# Allegro board dl-wkv0101.brd
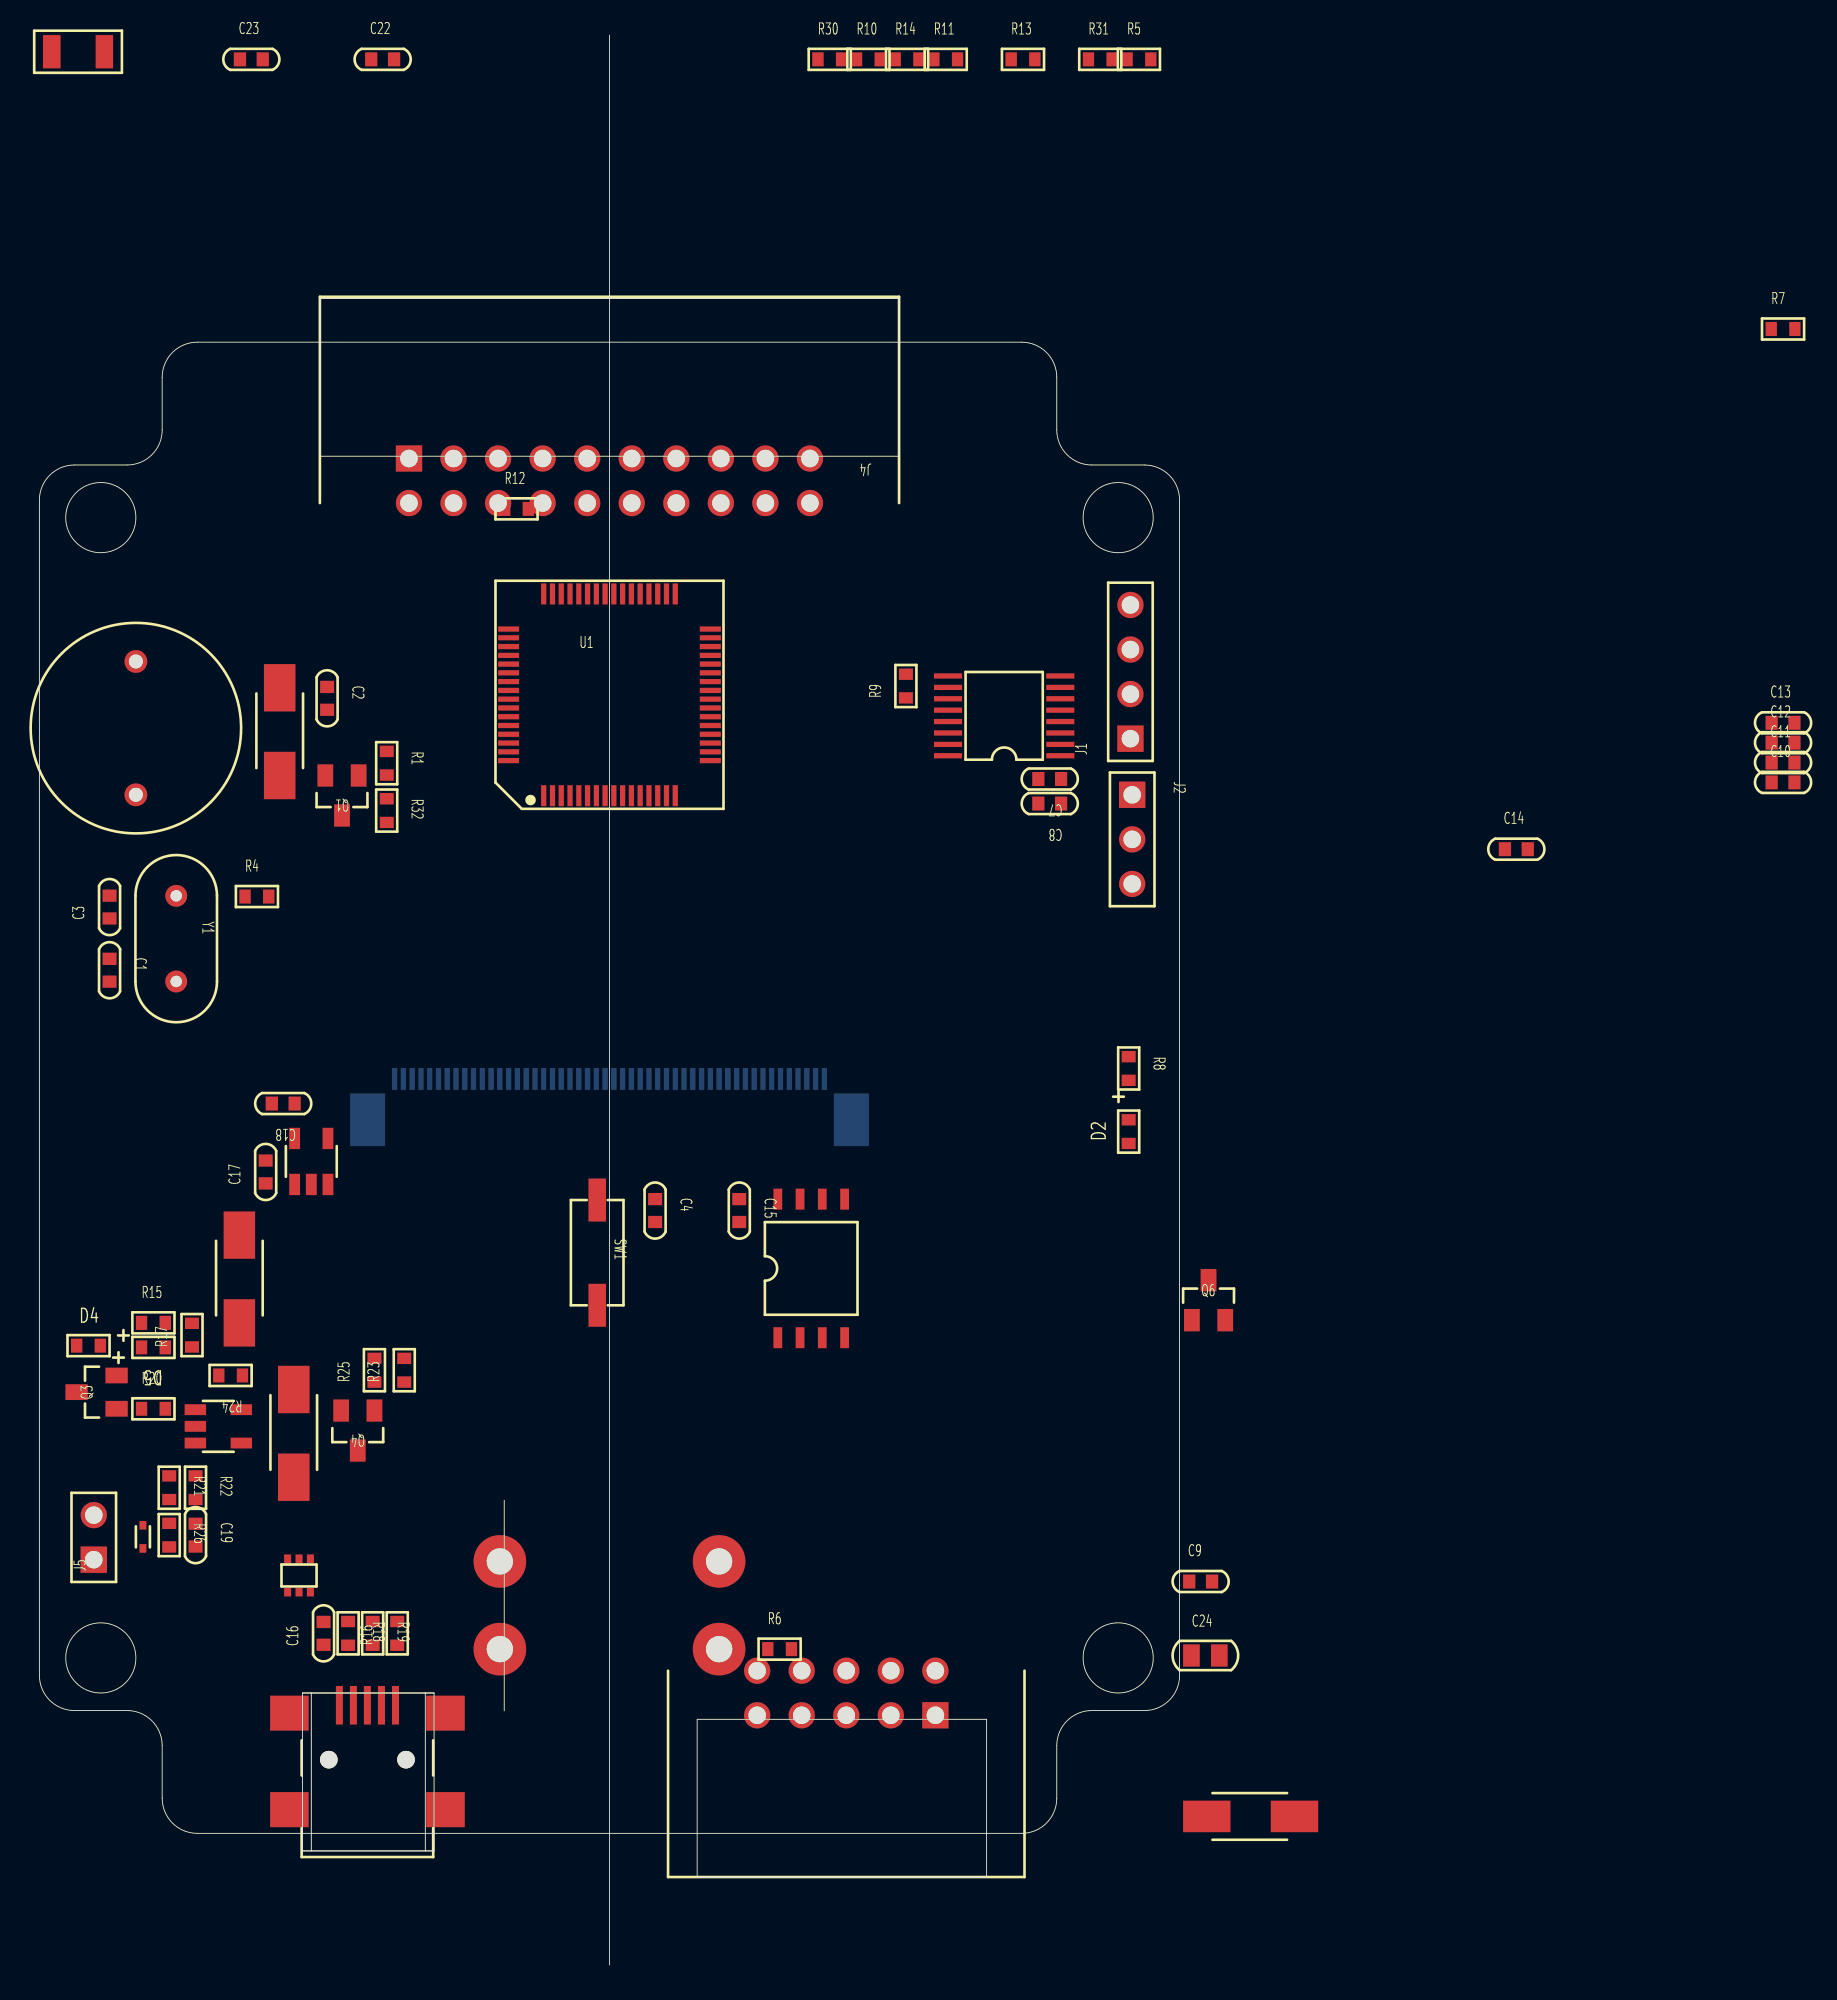
[diagram p0: board, top side]
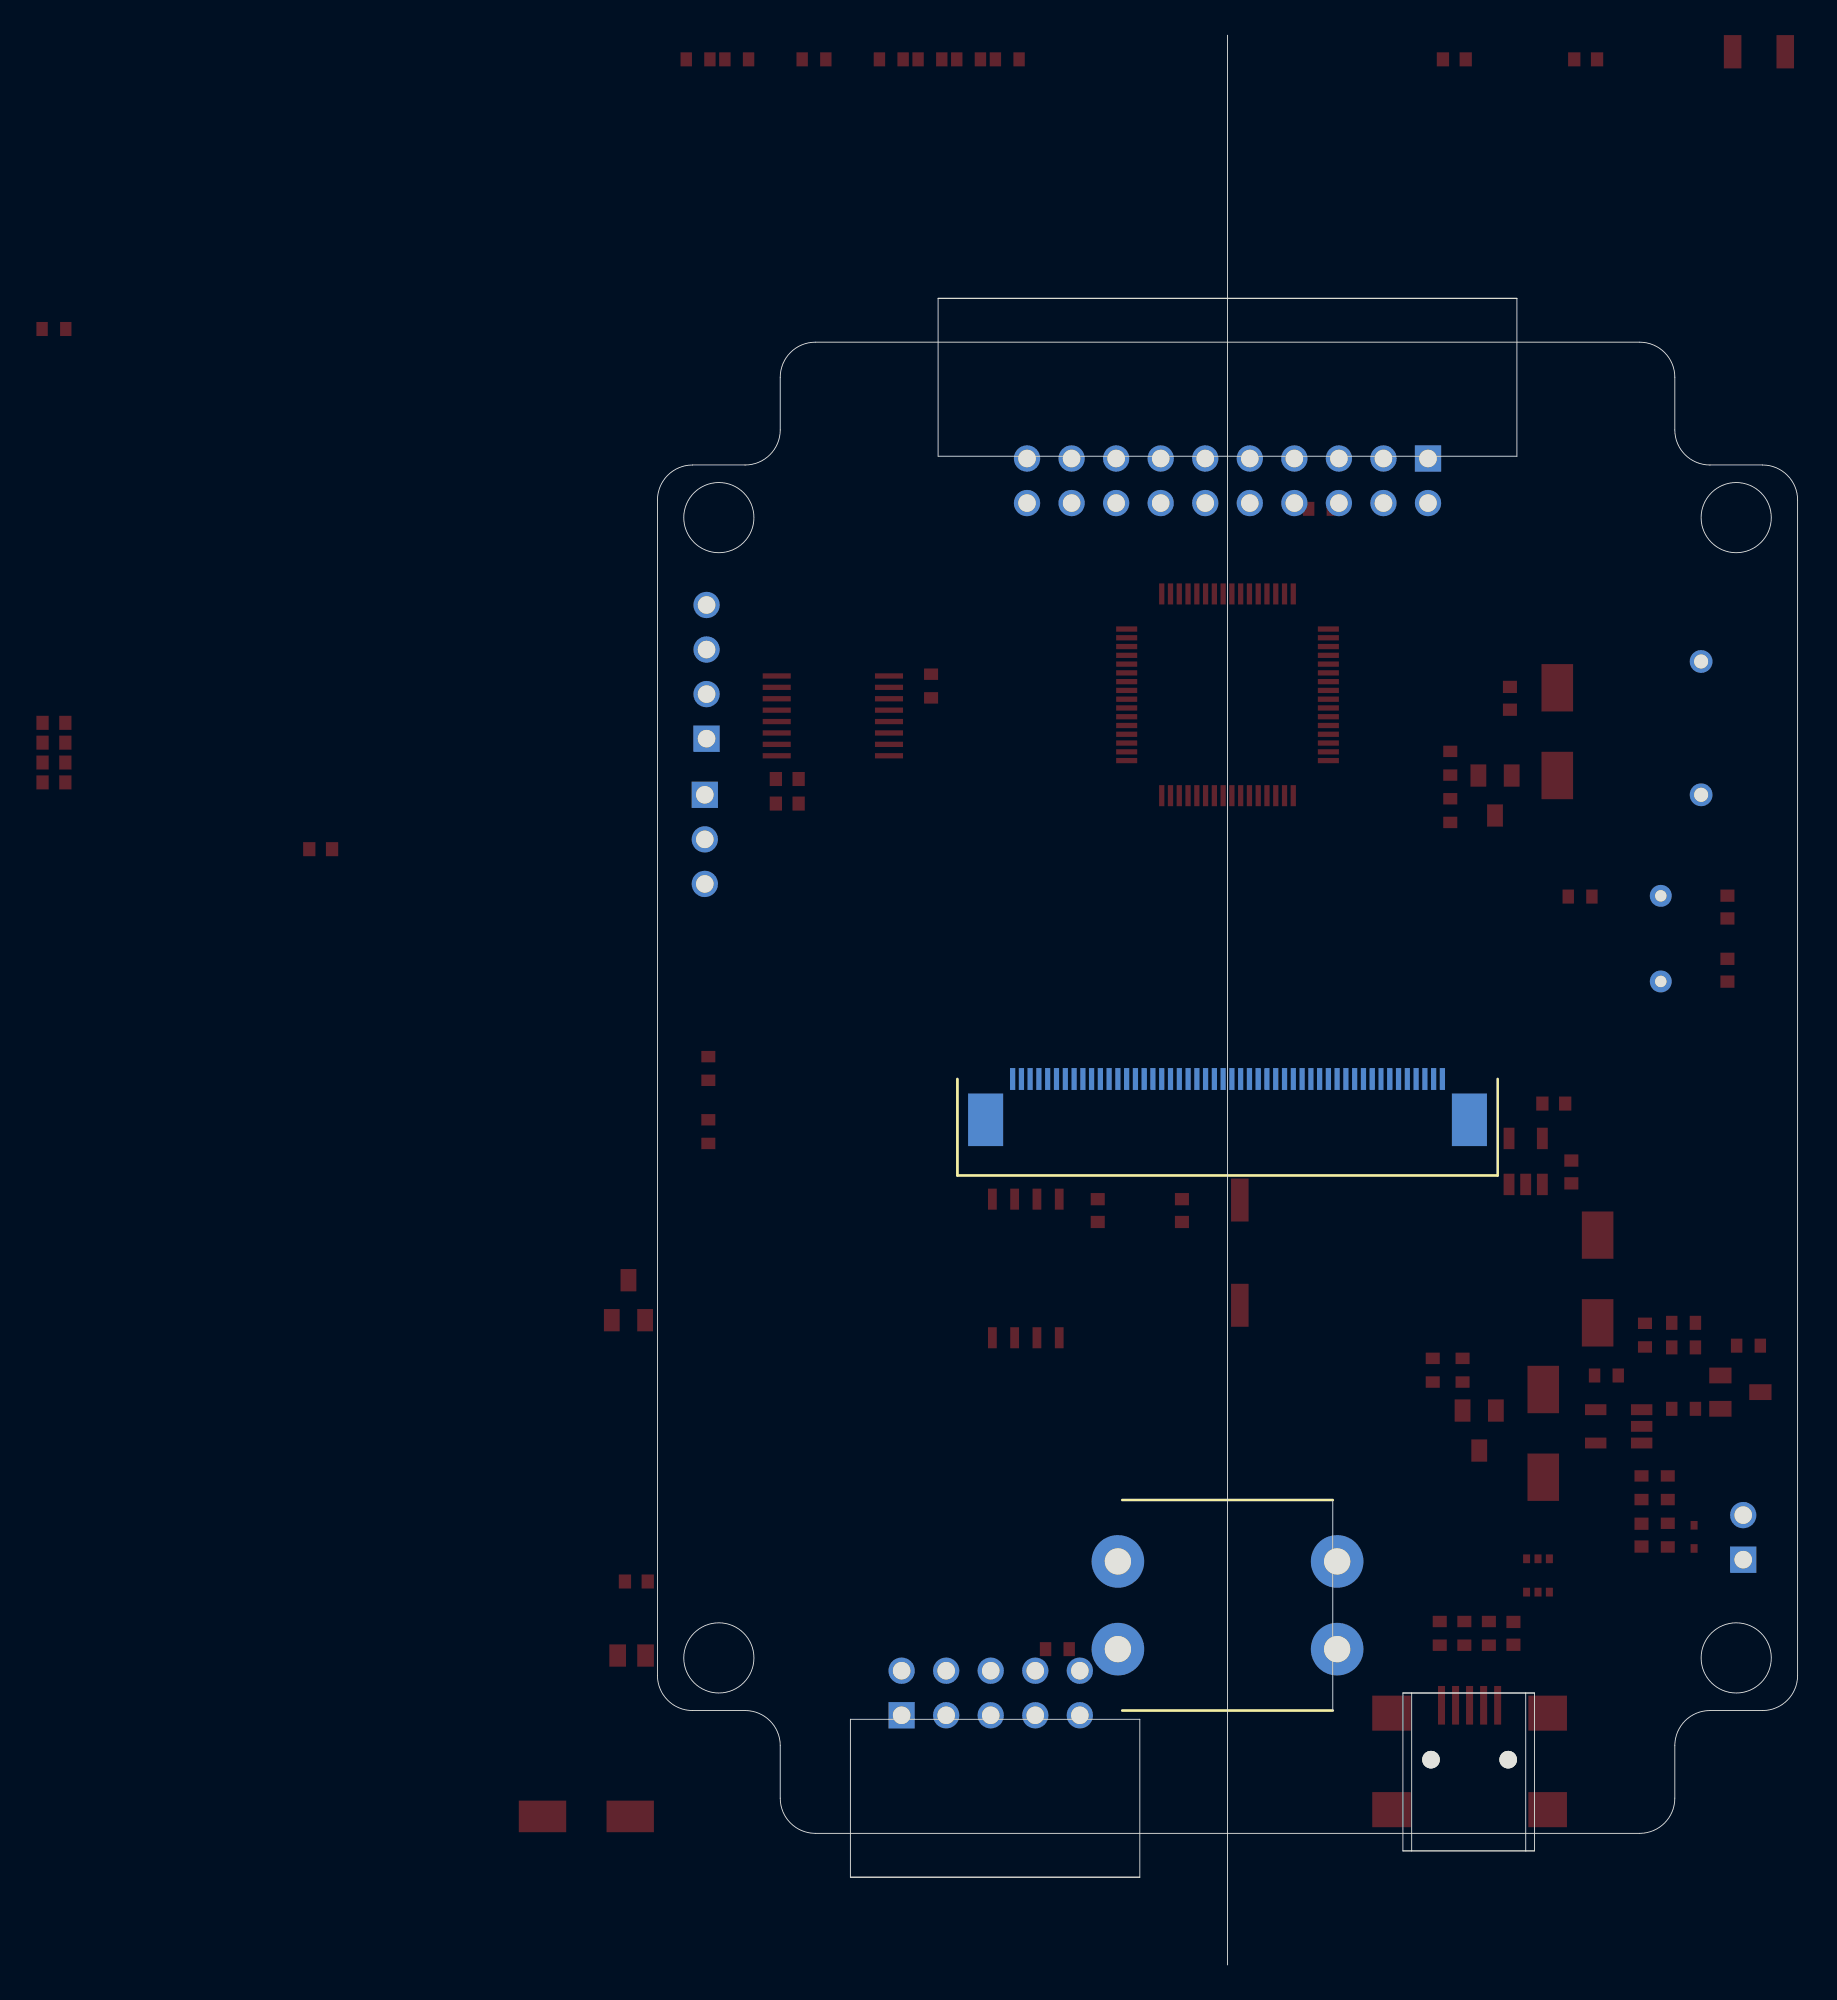
[diagram p1: board, bottom side, seen from below]

Outline 65 x 110 mm; copper layers: TOP, BOTTOM. Coordinates in mm from the lower left corner of the outline.
Outline path: circle c3.5,82.5 r2 ; circle c3.5,17.5 r2 ; circle c61.5,82.5 r2 ; circle c61.5,17.5 r2 ; 15,15.5 22.5,15.5 ; 15,15.5 15,6.5 ; 15,15.5 15.5,15.5 ; 22.5,15.5 22,15.5 ; 22.5,15.5 22.5,6.5 ; 15,6.5 22.5,6.5 ; 15,6.5 15.5,6.5 ; 22.5,6.5 22,6.5 ; 15.5,15.5 15.5,6.5 ; 15.5,15.5 22,15.5 ; 15.5,6.5 22,6.5 ; 16,95 16,86 49,86 49,95 ; 16,95 49,95 ; 16,95 49,95 ; 22,15.5 22,6.5 ; 26.5,26.48 26.5,14.48 ; 32.5,0 32.5,110 ; 37.5,5 37.5,14 54,14 54,5 ; 37.5,5 54,5 ; 37.5,5 54,5 ; 0,83.5 0,16.5 arc(0.59,15.09) 2,14.5 5,14.5 arc(6.41,13.91) 7,12.5 7,9.5 arc(7.59,8.09) 9,7.5 56,7.5 arc(57.41,8.09) 58,9.5 58,12.5 arc(58.59,13.91) 60,14.5 63,14.5 arc(64.41,15.09) 65,16.5 65,83.5 arc(64.41,84.91) 63,85.5 60,85.5 arc(58.59,86.09) 58,87.5 58,90.5 arc(57.41,91.91) 56,92.5 9,92.5 arc(7.59,91.91) 7,90.5 7,87.5 arc(6.41,86.09) 5,85.5 2,85.5 arc(0.59,84.91) 0,83.5

## Placement (name value [footprint] x y rotation side)
C1  30pF/CAPC0603  [CAPC0603]  4 56.7 270 top
C2  100nF/CAPC0603  [CAPC0603]  16.4 72.2 270 top
C3  30pF/CAPC0603  [CAPC0603]  4 60.3 90 top
C4  100nF/CAPC0603  [CAPC0603]  35.1 43 270 top
C7  100nF/CAPC0603  [CAPC0603]  57.6 67.6 180 top
C8  1uF/CAPC0603  [CAPC0603]  57.6 66.2 180 top
C9  1uF/CAPC0603  [CAPC0603]  66.2 21.85 0 top
C10  100nF/CAPC0603  [CAPC0603]  99.41 67.41 0 top
C11  100nF/CAPC0603  [CAPC0603]  99.41 68.54 0 top
C12  100nF/CAPC0603  [CAPC0603]  99.41 69.67 0 top
C13  100nF/CAPC0603  [CAPC0603]  99.41 70.8 0 top
C14  100nF/CAPC0603  [CAPC0603]  84.2 63.6 0 top
C15  100nF/CAPC0603  [CAPC0603]  39.9 43 270 top
C16  1uF/CAPC0603  [CAPC0603]  16.2 18.9 90 top
C17  1uF/CAPC0603  [CAPC0603]  12.9 45.2 90 top
C18  1uF/CAPC0603  [CAPC0603]  13.9 49.1 180 top
C19  100nF/CAPC0603  [CAPC0603]  8.9 24.5 270 top
C22  100nF/CAPC0603  [CAPC0603]  19.57 108.62 0 top
C23  100nF/CAPC0603  [CAPC0603]  12.08 108.62 0 top
C24  10uF/CAPC0805  [CAPC0805]  66.47 17.64 0 top
D1  SS34  [DO-214AC]  13.7 72.8 270 top
D2  LED  [LEDM0603]  62.1 47.5 90 top
D3  SS34  [DO-214AC]  66.55 8.46 0 top
D4  GREEN  [LEDM0603]  2.8 35.3 0 top
D5  RED  [LEDM0603]  6.5 35.2 180 top
D6  SS34  [DO-214AC]  11.4 41.6 270 top
D7  SS34  [DO-214AC]  14.5 32.8 270 top
D8  ESD5Z6_0T1G  [SOD523]  5.9 24.4 270 top
F1  500mA  [FUSE1206]  0.7 109.06 0 top
J1  MCU_DEBUG  [HD254P-4X1]  62.2 69.9 90 top
J2  MCU_UART  [HD254P-3X1]  62.3 66.7 270 top
J3  HEADER 5X2  [HD254P-5X2-90]  46 15.5 0 top
J4  SWD  [SH254P-10X2-90]  32.5 84.6 180 top
J5  4_2V/LI BATTERY  [HD254P-2X1]  3.1 23.1 90 top
LCD4  LCD_TFT_2R4  [TFT_2R4_0R5X50]  32.5 50.5 180 bottom
LS1  SPEAKER  [SPEAKER12X9R5]  5.5 70.5 270 top
Q1  S8050  [SOT23]  18.2 67.8 180 top
Q3  S8050  [SOT23]  4.4 31.7 90 top
Q4  SI2301  [SOT23]  19.1 31.6 180 top
Q6  S8050  [SOT23]  65.7 36.75 0 top
R1  1K/RESC0603  [RESC0603]  19.8 68.5 270 top
R4  30R/RESC0603  [RESC0603]  12.4 60.9 0 top
R5  10K/RESC0603  [RESC0603]  62.68 108.62 0 top
R6  10K/RESC0603  [RESC0603]  42.2 18 0 top
R7  10K/RESC0603  [RESC0603]  99.41 93.25 0 top
R8  510R/RESC0603  [RESC0603]  62.1 51.1 270 top
R9  10K/RESC0603  [RESC0603]  49.4 72.9 90 top
R10  0R/RESC0603  [RESC0603]  47.26 108.62 0 top
R11  0R/RESC0603/NC  [RESC0603]  51.67 108.62 0 top
R12  10K/RESC0603  [RESC0603]  27.2 83 0 top
R13  10K/RESC0603  [RESC0603]  56.07 108.62 0 top
R14  0R/RESC0603  [RESC0603]  49.46 108.62 0 top
R15  680R/RESC0603  [RESC0603]  6.5 36.6 0 top
R16  1K5/RESC0603  [RESC0603]  20.4 18.9 90 top
R17  10K/RESC0603  [RESC0603]  8.7 35.9 90 top
R18  33R/RESC0603  [RESC0603]  17.6 18.9 270 top
R19  33R/RESC0603  [RESC0603]  19 18.9 270 top
R20  68K/RESC0603  [RESC0603]  6.5 31.7 0 top
R21  50K/RESC0603/1%  [RESC0603]  7.4 27.2 270 top
R22  50K/RESC0603/1%  [RESC0603]  8.9 27.2 270 top
R23  100R/RESC0603  [RESC0603]  20.8 33.9 90 top
R24  1_66K/RESC0603/1%  [RESC0603]  10.9 33.6 180 top
R25  51K/RESC0603  [RESC0603]  19.1 33.9 90 top
R26  50K/RESC0603/1%  [RESC0603]  7.4 24.5 270 top
R30  1K/RESC0603  [RESC0603]  45.06 108.62 0 top
R31  10K/RESC0603  [RESC0603]  60.48 108.62 0 top
R32  10K/RESC0603  [RESC0603]  19.8 65.8 270 top
SW1  SW RST  [SW]  31.8 43.6 270 top
SW2  SW CTL  [SW12X12X8R5]  32.5 20.5 180 bottom
U1  stm32f103r8t6/lqfp64  [LQFP50P1200X1200X160-64]  32.5 72.4 0 top
U2  XPT2046  [TSSOP16]  55 71.2 90 top
U3  W25Q128FV  [VSOP8]  44 39.7 0 top
U4  USB-CONNECTER  [MINIUSB]  18.7 14.8 0 top
U5  TP4054  [SOT23-5]  10.2 30.7 270 top
U6  NUP2202W1  [SOT363]  14.8 22.2 180 top
U7  RT9013-SOT23-5  [SOT23-5]  15.5 45.8 0 top
Y1  8M  [XTAL-HC49S]  7.8 58.5 270 top

## Library data of the parts
C1-C4 C7-C19 C22-C24 = CAP NP
D1 D3 D6 D7 = DIODE
D2 D4 D5 = LED
D8 = DIODE TVS BI-DIR
F1 = FUSE
J1 = CON4
J2 = CON3
J3 = HEADER 5X2
J4 = HEADER 10X2
J5 = CON2
LCD4 = LCD_TFT_2R4
LS1 = SPEAKER
Q1 Q3 Q6 = 1R1001
Q4 = MOSFET P GSD
R1 R4-R26 R30-R32 = R2
SW1 = SW PUSHBUTTON-SPST/SM
SW2 = SW PUSHBUTTON-DPST
U1 = stm32f103r8t6/lqfp64
U2 = XPT2046
U3 = W25Q128FV
U4 = USB-CONNECTER
U5 = TP4054
U6 = NUP2202W1
U7 = RT9013-SOT23-5
Y1 = ZTA

## Footprints (pads in the part's own frame, mm; a bottom-side part is the same pattern mirrored in y, then rotated)
CAPC0603
  rect 0.7x0.8 smd: 1(-0.65,0) 2(0.65,0)
CAPC0805
  rect 0.95x1.27 smd: 1(-0.795,0) 2(0.795,0)
DO-214AC
  rect 2.7x1.8 smd: 1(0,0) 2(5,0)
FUSE1206
  rect 1x1.9 smd: 1(0,0) 2(3,0)
HD254P-2X1
  rect 1.5x1.5 hole 1: 1(0,0)
  round 1.5 hole 1: 2(2.54,0)
HD254P-3X1
  rect 1.5x1.5 hole 1: 1(0,0)
  round 1.5 hole 1: 2(2.54,0) 3(5.08,0)
HD254P-4X1
  rect 1.5x1.5 hole 1: 1(0,0)
  round 1.5 hole 1: 2(2.54,0) 3(5.08,0) 4(7.62,0)
HD254P-5X2-90
  rect 1.5x1.5 hole 1: 1(5.08,-1.27)
  round 1.5 hole 1: 2(5.08,1.27) 3(2.54,-1.27) 4(2.54,1.27) 5(0,-1.27) 6(0,1.27) 7(-2.54,-1.27) 8(-2.54,1.27) 9(-5.08,-1.27) 10(-5.08,1.27)
LEDM0603
  rect 0.65x0.8 smd: 1(-0.675,0) 2(0.675,0)
LQFP50P1200X1200X160-64
  rect 0.3x1.2 smd: 1(-3.75,-5.75) 2(-3.25,-5.75) 3(-2.75,-5.75) 4(-2.25,-5.75) 5(-1.75,-5.75) 6(-1.25,-5.75) 7(-0.75,-5.75) 8(-0.25,-5.75) 9(0.25,-5.75) 10(0.75,-5.75) 11(1.25,-5.75) 12(1.75,-5.75) 13(2.25,-5.75) 14(2.75,-5.75) 15(3.25,-5.75) 16(3.75,-5.75) 33(3.75,5.75) 34(3.25,5.75) 35(2.75,5.75) 36(2.25,5.75) 37(1.75,5.75) 38(1.25,5.75) 39(0.75,5.75) 40(0.25,5.75) 41(-0.25,5.75) 42(-0.75,5.75) 43(-1.25,5.75) 44(-1.75,5.75) 45(-2.25,5.75) 46(-2.75,5.75) 47(-3.25,5.75) 48(-3.75,5.75)
  rect 1.2x0.3 smd: 17(5.75,-3.75) 18(5.75,-3.25) 19(5.75,-2.75) 20(5.75,-2.25) 21(5.75,-1.75) 22(5.75,-1.25) 23(5.75,-0.75) 24(5.75,-0.25) 25(5.75,0.25) 26(5.75,0.75) 27(5.75,1.25) 28(5.75,1.75) 29(5.75,2.25) 30(5.75,2.75) 31(5.75,3.25) 32(5.75,3.75) 49(-5.75,3.75) 50(-5.75,3.25) 51(-5.75,2.75) 52(-5.75,2.25) 53(-5.75,1.75) 54(-5.75,1.25) 55(-5.75,0.75) 56(-5.75,0.25) 57(-5.75,-0.25) 58(-5.75,-0.75) 59(-5.75,-1.25) 60(-5.75,-1.75) 61(-5.75,-2.25) 62(-5.75,-2.75) 63(-5.75,-3.25) 64(-5.75,-3.75)
MINIUSB
  rect 2.2x2 smd: (-4.45,-0.45) (-4.45,-5.95) (4.45,-0.45) (4.45,-5.95)
  round 1 hole 1 unplated: (-2.2,-3.1) (2.2,-3.1)
  rect 0.4x2.2 smd: 1(-1.6,0) 2(-0.8,0) 3(0,0) 4(0.8,0) 5(1.6,0)
RESC0603
  rect 0.65x0.8 smd: 1(-0.675,0) 2(0.675,0)
SH254P-10X2-90
  rect 1.5x1.5 hole 1: 1(11.43,-1.27)
  round 1.5 hole 1: 2(11.43,1.27) 3(8.89,-1.27) 4(8.89,1.27) 5(6.35,-1.27) 6(6.35,1.27) 7(3.81,-1.27) 8(3.81,1.27) 9(1.27,-1.27) 10(1.27,1.27) 11(-1.27,-1.27) 12(-1.27,1.27) 13(-3.81,-1.27) 14(-3.81,1.27) 15(-6.35,-1.27) 16(-6.35,1.27) 17(-8.89,-1.27) 18(-8.89,1.27) 19(-11.43,-1.27) 20(-11.43,1.27)
SOD523
  rect 0.49x0.4 smd: 1(-0.66,0) 2(0.66,0)
SOT23
  rect 0.9x1.27 smd: 1(0,0) 2(1.9,0) 3(0.95,2.28)
SOT23-5
  rect 0.62x1.22 smd: 1(-0.95,-1.31) 2(0,-1.31) 3(0.95,-1.31) 4(0.95,1.31) 5(-0.95,1.31)
SOT363
  rect 0.4x0.5 smd: 1(-0.65,-0.95) 2(0,-0.95) 3(0.65,-0.95) 4(0.65,0.95) 5(0,0.95) 6(-0.65,0.95)
SPEAKER12X9R5
  round 1.3 hole 0.8: 1(-3.8,0) 2(3.8,0)
SW
  rect 2.45x1 smd: 1(0,0) 2(6,0)
SW12X12X8R5
  round 3 hole 1.5: 1(-6.25,-2.5) 2(6.25,-2.5) 3(-6.25,2.5) 4(6.25,2.5)
TFT_2R4_0R5X50
  rect 2x3 smd: (-13.79,-2.325) (13.79,-2.325)
  rect 0.3x1.25 smd: 1(12.25,0) 2(11.75,0) 3(11.25,0) 4(10.75,0) 5(10.25,0) 6(9.75,0) 7(9.25,0) 8(8.75,0) 9(8.25,0) 10(7.75,0) 11(7.25,0) 12(6.75,0) 13(6.25,0) 14(5.75,0) 15(5.25,0) 16(4.75,0) 17(4.25,0) 18(3.75,0) 19(3.25,0) 20(2.75,0) 21(2.25,0) 22(1.75,0) 23(1.25,0) 24(0.75,0) 25(0.25,0) 26(-0.25,0) 27(-0.75,0) 28(-1.25,0) 29(-1.75,0) 30(-2.25,0) 31(-2.75,0) 32(-3.25,0) 33(-3.75,0) 34(-4.25,0) 35(-4.75,0) 36(-5.25,0) 37(-5.75,0) 38(-6.25,0) 39(-6.75,0) 40(-7.25,0) 41(-7.75,0) 42(-8.25,0) 43(-8.75,0) 44(-9.25,0) 45(-9.75,0) 46(-10.25,0) 47(-10.75,0) 48(-11.25,0) 49(-11.75,0) 50(-12.25,0)
TSSOP16
  rect 0.3x1.6 smd: 1(-2.275,-3.2) 2(-1.625,-3.2) 3(-0.975,-3.2) 4(-0.325,-3.2) 5(0.325,-3.2) 6(0.975,-3.2) 7(1.625,-3.2) 8(2.275,-3.2) 9(2.275,3.2) 10(1.625,3.2) 11(0.975,3.2) 12(0.325,3.2) 13(-0.325,3.2) 14(-0.975,3.2) 15(-1.625,3.2) 16(-2.275,3.2)
VSOP8
  rect 0.5x1.2 smd: 1(-1.905,-3.95) 2(-0.635,-3.95) 3(0.635,-3.95) 4(1.905,-3.95) 5(1.905,3.95) 6(0.635,3.95) 7(-0.635,3.95) 8(-1.905,3.95)
XTAL-HC49S
  round 1.25 hole 0.65: 1(-2.44,0) 2(2.44,0)

## Nets
GND: C1.1 C2.2 C3.1 C4.2 C7.2 C8.2 C9.2 C10.2 C11.2 C12.2 C13.2 C14.2 C15.2 C16.2 C17.2 C18.2 C19.2 C22.2 C23.2 C24.2 D2.1(CATHODE) D8.2 J1.1 J2.1 J3.9 J3.10 J4.3 J4.5 J4.7 J4.9 J4.11 J4.13 J4.15 J4.17 J4.19 J5.1 LCD4.7(IM1) LCD4.8(IM2) LCD4.9(IM3) LCD4.11(VSYNC) LCD4.12(HSYNC) LCD4.13(DOTCK) LCD4.14(DE) LCD4.15(DB17) LCD4.16(DB16) LCD4.34(SDI) LCD4.43(GND0) LCD4.48(GND1) LCD4.49(GND2) LCD4.50(GND3) Q1.3(E) Q3.2(C) Q6.3(E) R5.1 R6.2 R24.2 R25.2 R26.2 R31.2 R32.2 SW1.2 U1.12(VSSA) U1.18(VSS_4) U1.31(VSS_1) U1.47(VSS_2) U1.63(VSS_3) U2.6(GND) U2.7(VBAT) U2.8(IN) U2.15(C\S\) U3.4(GND) U4.5(GND) U5.2(GND) U6.2(VN) U7.2(GND)
VCC_3V3_MAIN: C2.1 C7.1 C8.1 C9.1 C10.1 C11.1 C12.1 C13.1 C14.1 C15.1 C18.1 C22.1 C23.1 C24.1 D1.1(K) J1.4 J3.1 LCD4.1(LEDA) LCD4.6(IM0) LCD4.40(VDDI0) LCD4.41(VDDI1) LCD4.42(VCI) LS1.1 R7.1 R9.2 R10.1 R16.1 SW2.3 SW2.4 U1.1(VBAT) U1.13(VDDA) U1.19(VDD_4) U1.32(VDD_1) U1.48(VDD_2) U1.64(VDD_3) U2.1(VCC) U2.9(VREF) U2.10(IOVDD) U3.3(\W\P/IO2) U3.7(H\O\L\D\/R\E\S\E\T) U3.8(VCC) U7.5(VOUT)
VCC_4V_BAT: D7.2(A) D8.1 J5.2 Q4.3(D) R21.1 R22.1 U5.3(BAT)
VCC_5V_MAIN: C17.1 D6.1(K) D7.1(K) J3.2 Q4.2(S) R11.1 U7.1(VIN) U7.3(EN)
VCC_5V_USB: C16.1 D6.2(A) R15.2 R17.2 R23.2 U4.1(VCC) U5.4(VCC) U6.5(VP)
VCC_DEBUG_REF: F1.2 J4.2 R12.1 R13.1 R14.1
BAT_V_ADJ: C19.1 R21.2 R22.2 R26.1 U1.15(PA1)
DEBUG_RESET: J4.16 U1.59(PB7)
DEBUG_SWCLK: J4.10 R13.2 U1.57(PB5)
DEBUG_SWDIO: J4.8 R12.2 U1.56(PB4)
DEBUG_SWO: J4.14 U1.58(PB6)
DEV_CTL_ABORT: J3.5 U1.43(PA10)
DEV_CTL_OPTION: J3.7 U1.54(PD2)
DEV_CTL_START: J3.3 U1.42(PA9)
DEV_STATUS_BUSY: J3.4 U1.29(PB10)
DEV_STATUS_ERR: J3.8 U1.41(PA8)
DEV_STATUS_OK: J3.6 U1.30(PB11)
FLASH_CS: U1.50(PA15) U3.1(C\S\)
LCD_BK_CTL: R30.1 U1.62(PB9)
LCD_CS: LCD4.38(CSX) U1.26(PB0)
LCD_DATA0: LCD4.32(DB0) U1.8(PC0)
LCD_DATA1: LCD4.31(DB1) U1.9(PC1)
LCD_DATA2: LCD4.30(DB2) U1.10(PC2)
LCD_DATA3: LCD4.29(DB3) U1.11(PC3)
LCD_DATA4: LCD4.28(DB4) U1.24(PC4)
LCD_DATA5: LCD4.27(DB5) U1.25(PC5)
LCD_DATA6: LCD4.26(DB6) U1.37(PC6)
LCD_DATA7: LCD4.25(DB7) U1.38(PC7)
LCD_DATA8: LCD4.24(DB8) U1.39(PC8)
LCD_DATA9: LCD4.23(DB9) U1.40(PC9)
LCD_DATA10: LCD4.22(DB10) U1.51(PC10)
LCD_DATA11: LCD4.21(DB11) U1.52(PC11)
LCD_DATA12: LCD4.20(DB12) U1.53(PC12)
LCD_DATA13: LCD4.19(DB13) U1.2(PC13/TAMPER-RTC)
LCD_DATA14: LCD4.18(DB14) U1.3(PC14/OSC32_IN)
LCD_DATA15: LCD4.17(DB15) U1.4(PC15/OSC32_OUT)
LCD_RD: LCD4.35(RD) U1.28(PB2)
LCD_RS: LCD4.37(D/CX/SCL) U1.55(PB3)
LCD_RST: LCD4.10(RESET) U1.61(PB8)
LCD_WR: LCD4.36(WRX/D/CX) U1.27(PB1)
SPERKER_CTL: R1.1 U1.33(PB12)
STATUS_LED_CTL: R8.1 U1.20(PA4)
SYS_BOOT0: R5.2 U1.60(BOOT0)
SYS_SPI1_MISO: U1.22(PA6) U2.12(DOUT)
SYS_SPI1_MOSI: U1.23(PA7) U2.14(DIN)
SYS_SPI1_SCK: U1.21(PA5) U2.16(DCLK)
SYS_SPI2_MISO: U1.35(PB14) U3.2(DO/IO1)
SYS_SPI2_MOSI: U1.36(PB15) U3.5(DI/IO0)
SYS_SPI2_SCK: U1.34(PB13) U3.6(CLK)
SYS_SWCLK: J1.2 U1.49(PA14)
SYS_SWDIO: J1.3 R7.2 U1.46(PA13)
SYS_USB_DM: R18.1 U1.44(PA11)
SYS_USB_DP: R16.2 R19.1 U1.45(PA12)
SYS_WKUP: R6.1 SW2.1 SW2.2 U1.14(PA0-WKUP)
TOUCH_DEV_BUSY: J2.3 U1.16(PA2) U2.13(BUSY)
TOUCH_DEV_PENIRQ: J2.2 R9.1 U1.17(PA3) U2.11(P\E\N\I\R\Q\)
TOUCH_X+: LCD4.44(X+) U2.2(XP)
TOUCH_X-: LCD4.46(X-) U2.4(XN)
TOUCH_Y+: LCD4.45(Y+) U2.3(YP)
TOUCH_Y-: LCD4.47(Y-) U2.5(YN)
N02207: C1.2 U1.5(OSC_IN) Y1.2
N02211: R4.2 U1.6(OSC_OUT)
N02215: C4.1 SW1.1 U1.7(NRST)
N08380: C3.2 R4.1 Y1.1
N10797: R19.2 U4.3(D+) U6.6(IO2)
N10819: R18.2 U4.2(D-) U6.1(IO1)
N11613: R24.1 U5.5(PROG)
N13492: Q4.1(G) R23.1 R25.1
N29052: D1.2(A) LS1.2 Q1.2(C)
N29535: Q1.1(B) R1.2 R32.1
N31835: D2.2(ANODE) R8.2
N46547: D3.2(A) R10.2 R11.2
N48106: J4.1 R14.2
N48387: D3.1(K) F1.1
N61244: Q3.1(B) R20.1
N61248: D5.1(CATHODE) R17.1 R20.2 U5.1(C\H\R\G\)
N62109: D4.1(CATHODE) Q3.3(E)
N62164: D4.2(ANODE) D5.2(ANODE) R15.1
N89367: Q6.1(B) R30.2 R31.1
N89455: LCD4.2(LEDK1) LCD4.3(LEDK2) LCD4.4(LEDK3) LCD4.5(LEDK4) Q6.2(C)

Pads without a net: J4 4 6 12 18 20; LCD4 33 39; U4 4; U6 3 4; U7 4
